# EAGLE board Custom_Teensy_3.1 (EAGLE 7.4.0)

Size 100 x 26.66 mm. Coordinates in mm from the lower left corner, seen from the top.
Outline: 0,0 100,0 100,26.66 0,26.66 0,0
Copper layers (1*16): Top 0.035mm / dielectric 1.5mm / Bottom 0.035mm
Design rules "default": minimum track width 10mil, minimum drill 24mil, track to track 8mil, track to pad 8mil, pad to pad 8mil, via to via 8mil, smd to smd 8mil, copper to edge 40mil, drill to drill 8mil, minimum pad ring 10mil, minimum via ring 8mil, stop-mask expansion 4mil, vias tented up to drill 0mil, thermal gap 10mil
Net classes: 1 USB: width 0.254 mm, drill 0.33 mm, clearance 0.159 mm; 2 Top GND Pour: clearance 0.762 mm to class 1

## Footprints (pad centres in the part's own frame; a part is rotated, then mirrored left to right if it is on the bottom)
0603-CAP = smd 1.1 x 1: 1 -0.85,0; 2 0.85,0
1981584-1 = smd 0.4 x 1.35: 1 -1.3,4.1; 2 -0.65,4.1; 3 0,4.1; 4 0.65,4.1; 5 1.3,4.1 | smd 1.8 x 1.8: M1 -1.15,1.45; M2 1.15,1.45 | smd 2.3 x 1.3: S1 -3.75,1.45; S2 3.75,1.45 | smd 1.6 x 1.6: S3 -3.2,3.885; S4 3.2,3.885
LPS3015 = smd 1.14 x 3.3: 1 -1.27,0; 2 1.27,0
0805 = smd 1.3 x 1.5: 1 -0.95,0; 2 0.95,0
LED-0603 = smd 1 x 1: A 0,-0.877; C 0,0.877
TACTILE-SWITCH-1101NE = smd 2.3 x 1.6: P$1 -3.15,0; P$2 3.15,0
0603-RES = smd 1.1 x 1: 1 -0.85,0; 2 0.85,0
EXB34V = smd 0.5 x 0.5: 1 -0.5,-0.7; 2 0.5,-0.7; 3 0.5,0.7; 4 -0.5,0.7
MK20DX256VLH7 = smd 1.1 x 0.285: 1 -5.7,3.75; 2 -5.7,3.25; 3 -5.7,2.75; 4 -5.7,2.25; 5 -5.7,1.75; 6 -5.7,1.25; 7 -5.7,0.75; 8 -5.7,0.25; 9 -5.7,-0.25; 10 -5.7,-0.75; 11 -5.7,-1.25; 12 -5.7,-1.75; 13 -5.7,-2.25; 14 -5.7,-2.75; 15 -5.7,-3.25; 16 -5.7,-3.75; 33 5.7,-3.75; 34 5.7,-3.25; 35 5.7,-2.75; 36 5.7,-2.25; 37 5.7,-1.75; 38 5.7,-1.25; 39 5.7,-0.75; 40 5.7,-0.25; 41 5.7,0.25; 42 5.7,0.75; 43 5.7,1.25; 44 5.7,1.75; 45 5.7,2.25; 46 5.7,2.75; 47 5.7,3.25; 48 5.7,3.75 | smd 0.285 x 1.1: 17 -3.75,-5.7; 18 -3.25,-5.7; 19 -2.75,-5.7; 20 -2.25,-5.7; 21 -1.75,-5.7; 22 -1.25,-5.7; 23 -0.75,-5.7; 24 -0.25,-5.7; 25 0.25,-5.7; 26 0.75,-5.7; 27 1.25,-5.7; 28 1.75,-5.7; 29 2.25,-5.7; 30 2.75,-5.7; 31 3.25,-5.7; 32 3.75,-5.7; 49 3.75,5.7; 50 3.25,5.7; 51 2.75,5.7; 52 2.25,5.7; 53 1.75,5.7; 54 1.25,5.7; 55 0.75,5.7; 56 0.25,5.7; 57 -0.25,5.7; 58 -0.75,5.7; 59 -1.25,5.7; 60 -1.75,5.7; 61 -2.25,5.7; 62 -2.75,5.7; 63 -3.25,5.7; 64 -3.75,5.7
QFN-10_PAD = smd 0.297 x 0.85: 1 -1,-1.475; 2 -0.5,-1.475; 3 0,-1.475; 4 0.5,-1.475; 5 1,-1.475; 6 1,1.475; 7 0.5,1.475; 8 0,1.475; 9 -0.5,1.475; 10 -1,1.475 | smd 0.7 x 0.28: 11 -1.5,0.25; 12 -1.5,-0.25; 13 1.5,0.25; 14 1.5,-0.25 | smd 2.4 x 1.65: 15 0,0
MINI54TAN = smd 0.203 x 1.5: 1 -2.75,-4.5; 2 -2.25,-4.5; 3 -1.75,-4.5; 4 -1.25,-4.5; 5 -0.75,-4.5; 6 -0.25,-4.5; 7 0.25,-4.5; 8 0.75,-4.5; 9 1.25,-4.5; 10 1.75,-4.5; 11 2.25,-4.5; 12 2.75,-4.5; 25 2.75,4.5; 26 2.25,4.5; 27 1.75,4.5; 28 1.25,4.5; 29 0.75,4.5; 30 0.25,4.5; 31 -0.25,4.5; 32 -0.75,4.5; 33 -1.25,4.5; 34 -1.75,4.5; 35 -2.25,4.5; 36 -2.75,4.5 | smd 1.5 x 0.203: 13 4.5,-2.75; 14 4.5,-2.25; 15 4.5,-1.75; 16 4.5,-1.25; 17 4.5,-0.75; 18 4.5,-0.25; 19 4.5,0.25; 20 4.5,0.75; 21 4.5,1.25; 22 4.5,1.75; 23 4.5,2.25; 24 4.5,2.75; 37 -4.5,2.75; 38 -4.5,2.25; 39 -4.5,1.75; 40 -4.5,1.25; 41 -4.5,0.75; 42 -4.5,0.25; 43 -4.5,-0.25; 44 -4.5,-0.75; 45 -4.5,-1.25; 46 -4.5,-1.75; 47 -4.5,-2.25; 48 -4.5,-2.75
CRYSTAL-TXC-7A = smd 1.7 x 2.4: P$1 1.85,0; P$2 -1.85,0
CRYSTAL-SMD-5X3 = smd 1.9 x 1.1: 1 -1.85,-1.15; 2 1.85,-1.15; 3 1.85,1.15; 4 -1.85,1.15

## Placement (x,y rotation side)
C1  10uF  [0603-CAP]  24.13,21.59 0 top
C2  0.1uF  [0603-CAP]  16.51,15.24 0 top
C3  22uF  [0603-CAP]  5.08,6.35 0 top
C4  0.1uF  [0603-CAP]  12.7,12.7 0 top
C5  0.1uF  [0603-CAP]  21.59,11.43 0 top
C11  0.1uF  [0603-CAP]  19.05,24.13 0 top
C14  0.1uF  [0603-CAP]  30.48,24.13 0 top
C16  0.1uF  [0603-CAP]  26.67,24.13 0 top
C17  2.2uF  [0603-CAP]  5.08,8.89 0 top
C18  0.1uF  [0603-CAP]  22.86,24.13 0 top
C19  0.1uF  [0603-CAP]  16.51,12.7 0 top
C20  2.2uF  [0603-CAP]  11.43,24.13 0 top
C21  0.1uF  [0603-CAP]  36.83,24.13 0 top
C22  0.1uF  [0603-CAP]  40.64,24.13 0 top
J1  1981584-1  [1981584-1]  0,17.78 270 top
L1  2.2uH, 2.1A  [LPS3015]  12.7,20.32 180 top
L2  600 Ohm/100 Mhz  [0805]  6.35,24.13 180 top
L3  600 Ohm/100 Mhz  [0805]  8.89,11.43 0 top
L4  600 Ohm/100 Mhz  [0805]  8.89,13.97 0 top
LED  AMBER/ 592 nm  [LED-0603]  2.54,6.35 0 top
LED1  [LED-0603]  7.62,6.35 0 top
PROGRAM  Program  [TACTILE-SWITCH-1101NE]  5.08,2.54 0 top
R2  10K  [0603-RES]  22.86,17.78 0 top
R3  2M  [0603-RES]  20.32,15.24 0 top
R4  220K  [0603-RES]  27.94,2.54 0 top
R6  220K  [0603-RES]  11.43,16.51 0 top
R7  1.2M  [0603-RES]  15.24,24.13 0 top
R9  470  [0603-RES]  7.62,16.51 0 top
R10  1K  [0603-RES]  24.13,2.54 180 top
R16  470  [0603-RES]  6.35,20.32 270 top
R30  470  [0603-RES]  5.08,11.43 180 top
RN1  33  [EXB34V]  8.89,19.05 270 top
U1  MK20DX256VLH7  [MK20DX256VLH7]  39.37,12.7 270 top
U2  TPS61200  [QFN-10_PAD]  19.05,20.32 90 top
U3  MINI54TAN  [MINI54TAN]  16.51,6.35 0 top
Y1  32.768KHz  [CRYSTAL-TXC-7A]  26.67,16.51 270 top
Y2  16Mhz/8pF  [CRYSTAL-SMD-5X3]  26.67,8.89 90 top

## Library data of the parts
C1 = appfruits; MF: Murata; MPN: GRM188R60J106ME47D
C2 C4 C5 C11 C14 C16 C18 C19 C21 C22 = appfruits; MF: Kemet; MPN: C0603C104J3RACTU
C3 = appfruits; MF: Murata; MPN: GRM188R60J226MEA0D
C17 C20 = appfruits; MF: Kemet; MPN: C0603C225K4PACTU
J1 = con-usb; MF: Hirose; MPN: ZX62-AB-5PA(11)
L1 = appfruits; MF: Coilcraft; MPN: LPS3015-222MRB
L2-L4 = appfruits; MF: Taiyo Yuden; MPN: BK2125HM601-T
LED = appfruits; MF: Avago Technologies; MPN: HSMA-C190
LED1 = appfruits; MF: Avago; MPN: HSMG-C190
PROGRAM = SparkFun-Electromechanical; MF: C&K Components; MPN: RS-282G05A3-SM RT
R2 = appfruits; MF: Panasonic; MPN: ERJ-3GEYJ103V
R3 = appfruits; MF: Panasonic; MPN: ERJ-3GEYJ205V
R4 R6 = appfruits; MF: Panasonic; MPN: ERJ-3GEYJ224V
R7 = appfruits; MF: Panasonic; MPN: ERJ-3GEYJ125V
R9 R16 R30 = appfruits; MF: Panasonic; MPN: ERJ-3GEYJ471V
R10 = appfruits; MF: Panasonic; MPN: ERJ-3GEYJ102V
RN1 = resistor-dil; MF: Panasonic; MPN: EXB-34V330JV; OC_FARNELL: unknown; OC_NEWARK: unknown
U1 = appfruits; MF: Freescale; MPN: MK20DX256VLH7
U2 = appfruits; MF: Texas Instruments; MPN: TPS61200DRCR; PROD_ID: IC-10035
U3 = TeensyCustom
Y1 = appfruits; MF: Epson Timing; MPN: FC-255 32.7680K-A3
Y2 = appfruits; MF: ECS; MPN: ECS-160-8-30B-CKM

## Nets
3.3V: C3.1 C5.1 C18.1 C19.1 C20.1 C21.1 C22.1 L3.2 LED1.C R7.2 U1.3 U1.7 U1.8 U1.21 U1.30 U1.48 U2.2 U3.42 U3.43
FB: R6.2 R7.1 U2.10
GND [Top GND Pour]: C5.2 C14.2 C18.2 C19.2 C20.2 C21.2 C22.2 J1.5 L2.1 L4.1 PROGRAM.P$1 R4.1 R6.1 R9.2 R30.1 U1.4 U1.31 U1.47 U3.5 U3.17 U3.25 U3.47
ID: J1.4 U1.23 U3.38
MISO: U1.52
MOSI: U1.51
N$1: LED1.A R9.1
N$2: L1.1 U2.3
N$12: LED.A U1.53
N$15: U1.24 U3.37
N$18: LED.C R30.2
N$19: PROGRAM.P$2 U3.20
N$22: C14.1 U3.18
N$27: U1.32 Y2.3
N$28: U1.33 Y2.1
N$29: U1.19 Y1.P$2
N$30: U1.20 Y1.P$1
PGND: C1.2 C3.2 C4.2 U2.4 U2.9 U2.11 U2.12 U2.13 U2.14 U2.15
PS: R2.2 U2.8
RESET_B: U1.34 U3.8
SCK: U1.50
SCL: U1.37
SDA: U1.38
SOFTPOWER: R10.1 U2.6
SWD_CLK: U1.22 U3.32
SWD_DIO: U1.25 U3.33 U3.34
USB_CON_N [USB]: J1.2 RN1.1
USB_CON_P [USB]: J1.3 RN1.2
USB_D_N [USB]: RN1.4 U1.6
USB_D_P [USB]: RN1.3 U1.5
USB_SHIELD: J1.S1 J1.S2 J1.S3 J1.S4 L2.2
UVLO: C2.2 R3.1 R4.2 U2.7
VAUX: C4.1 U2.1
VCC: C1.1 C2.1 J1.1 L1.2 R2.1 R3.2 R10.2 U2.5
VDDA: C17.1 L3.1 R16.1 U1.13
VREF_OUT: C16.1 U1.17
VREFH: C11.1 R16.2 U1.14
VREFL: C11.2 C16.2 C17.2 L4.2 U1.15 U1.16

## Tracks (layer width: path | path; a pad name or v marks a point on that pad's centre or on a via)
3.3V  (18 unrouted)
FB  (2 unrouted)
GND  (21 unrouted)
ID  (2 unrouted)
N$1  (1 unrouted)
N$2  (1 unrouted)
N$12  (1 unrouted)
N$15  (1 unrouted)
N$18  (1 unrouted)
N$19  (1 unrouted)
N$22  (1 unrouted)
N$27  (1 unrouted)
N$28  (1 unrouted)
N$29  (1 unrouted)
N$30  (1 unrouted)
PGND  (9 unrouted)
PS  (1 unrouted)
RESET_B  (1 unrouted)
SOFTPOWER  (1 unrouted)
SWD_CLK  (1 unrouted)
SWD_DIO  (2 unrouted)
USB_CON_N  (1 unrouted)
USB_CON_P  (1 unrouted)
USB_D_N  (1 unrouted)
USB_D_P  (1 unrouted)
USB_SHIELD  (4 unrouted)
UVLO  (3 unrouted)
VAUX  (1 unrouted)
VCC  (7 unrouted)
VDDA  (3 unrouted)
VREF_OUT  (1 unrouted)
VREFH  (2 unrouted)
VREFL  (5 unrouted)

## Text on the board
tSilk: IARC - Mission 7 Flight Controller | Designed by: Kevin Sheridan & Casimir Duchnowski